# Altium PCB esp_altimeter.PcbDoc
Units mil, origin at the board's own origin, x right, y up, seen from the top; angles counter-clockwise.
Board outline 738.19 x 1043.31 mil, 2 copper layers (Top Layer, Bottom Layer); 24 components, 15 nets, 84 pads, 0 vias.
Unrouted connection lines stored in the file: 53.
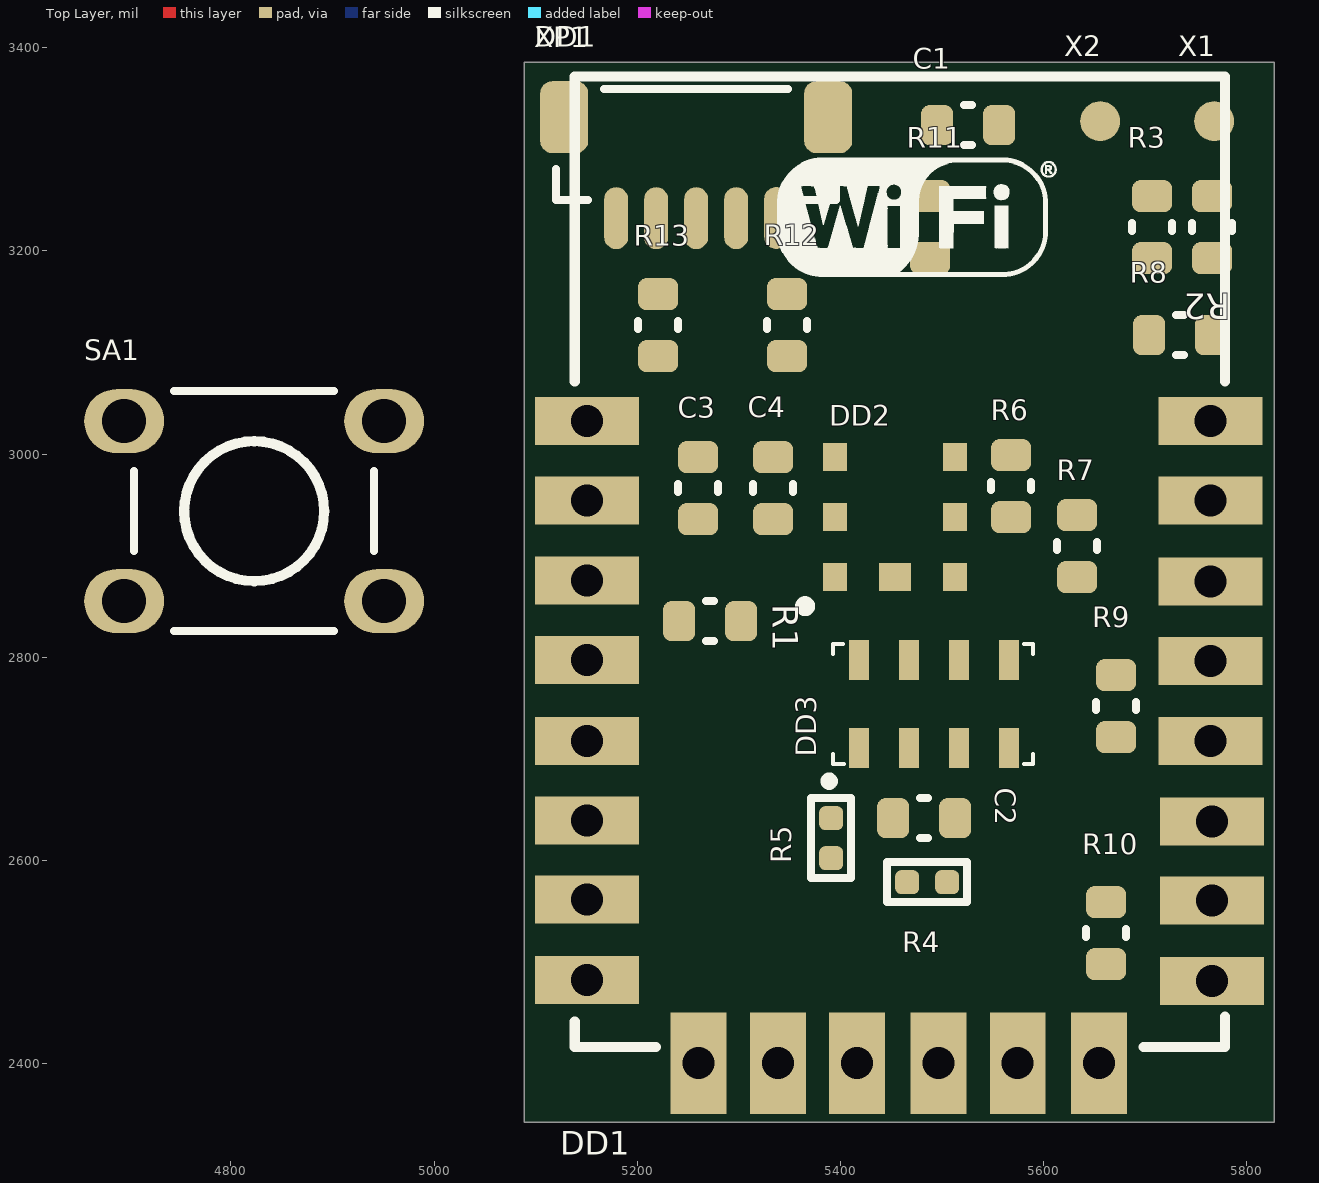
[diagram p0: Top Layer view]
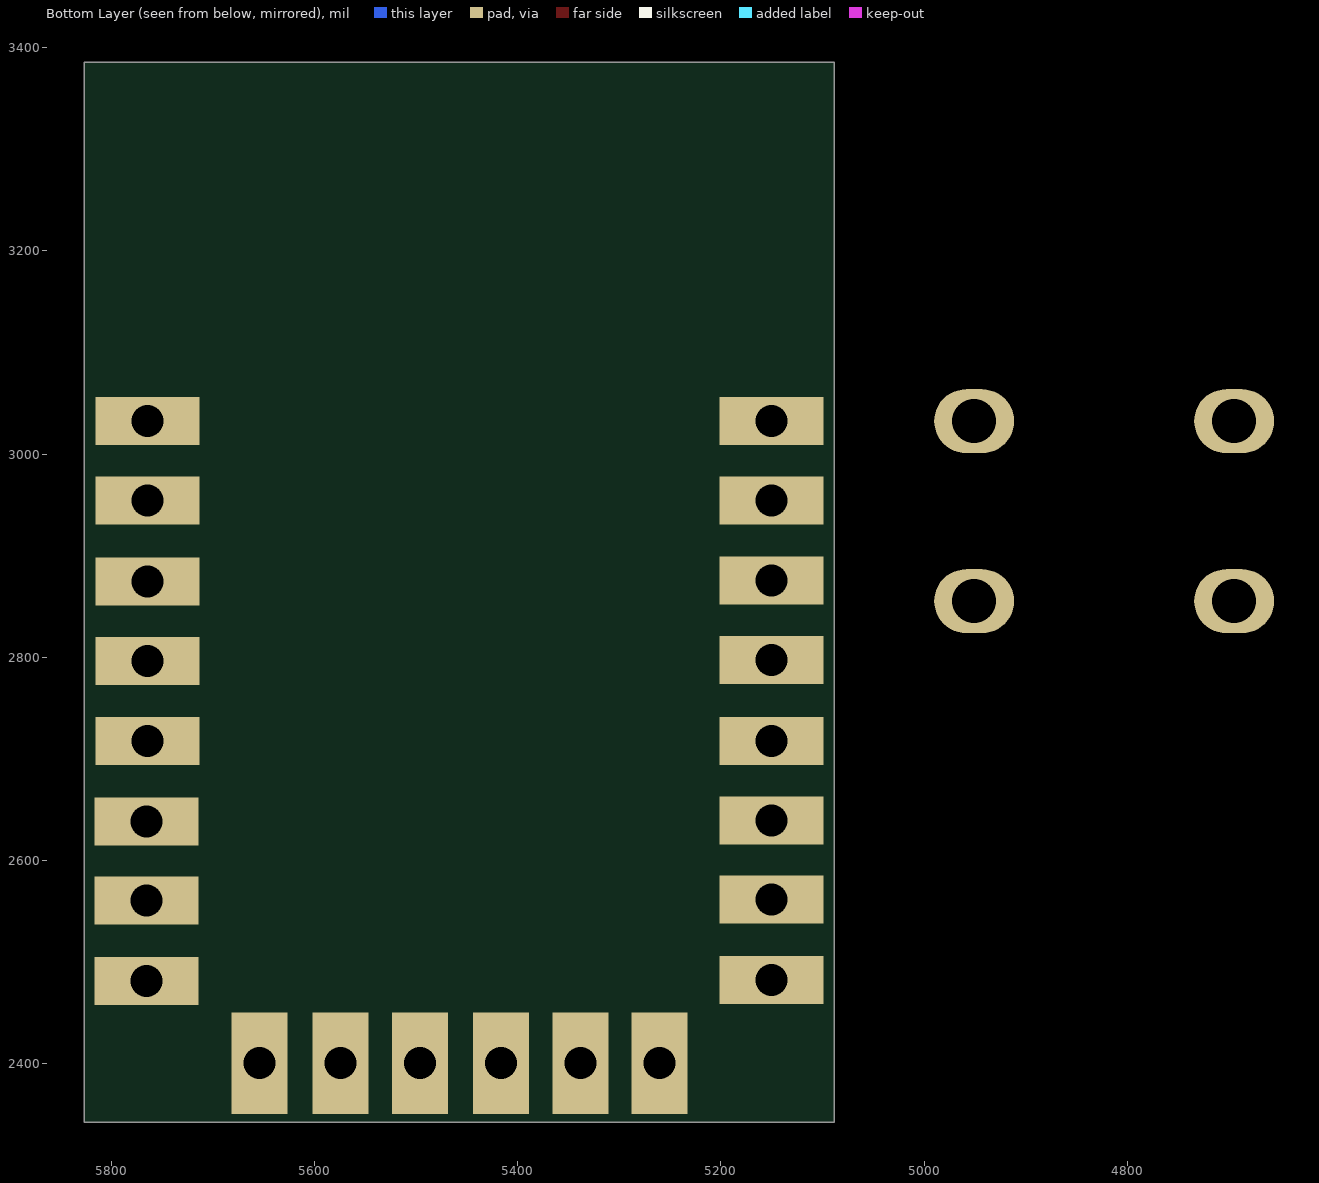
[diagram p1: Bottom Layer view, seen from below]

## Layer stack, top to bottom
Top Solder: solder mask 0.4, Solder Resist, Dk 3.5
Top Layer: signal copper 1.4
Dielectric 1: dielectric 12.6, FR-4, Dk 4.8
Bottom Layer: signal copper 1.4
Bottom Solder: solder mask 0.4, Solder Resist, Dk 3.5

## Board outline
5088.58,2342.52 5088.58,3385.83 5826.77,3385.83 5826.77,2342.52

## Design rules (kind name [scope] priority, off if disabled: settings)
Clearance [All] p1: gap=0 ignorepadtopadclearanceinfootprint=FALSE
PolygonConnect [All] p1: connectstyle=Relief reliefconductorwidth=10 reliefentries=4 polygonreliefangle="90 Angle" airgapwidth=10
RoutingVias [All] p1: holewidth=28 width=50 viastyle="Through Hole" minholewidth=28 minwidth=50 maxholewidth=28 maxwidth=50
SolderMaskExpansion [All] p1: expansion=4
Width [All] p1: maxlimit=10 minlimit=10 preferedwidth=10
30 further rules are at their usual default settings.

## Components (designator, comment, footprint, x,y, rotation, side; value= is the part's Value field where it differs from the comment)
C1 "Cap EIA 0603" "CAP EIA 0603" 5525.59,3323.82 r180 top value=0.1uF
C2 "Cap EIA 0603" "CAP EIA 0603" 5482.28,2641.73 r180 top value=100nF
C3 "Cap EIA 0603" "CAP EIA 0603" 5259.84,2966.54 r90 top
C4 "Cap EIA 0603" "CAP EIA 0603" 5333.66,2966.54 r90 top
DD1 "ESP8266-12E" "ESP8266 ESP-12-E" 5803.34,2386.59 r0 top
DD2 "BMP180" BMP180 5453.74,2937.99 r270 top
DD3 "MS5611" MS5611 5491.14,2753.94 r90 top
R1 "Res EIA 0603" "RES EIA 0603" 5271.65,2835.63 r0 top value=10k
R2 "Res EIA 0603" "RES EIA 0603" 5765.75,3223.43 r270 top value=10k
R3 "Res EIA 0603" "RES EIA 0603" 5706.69,3223.43 r270 top value=470
R4 "Res EIA 0402" "RES EIA 0402" 5485.24,2578.74 r180 top value=0
R5 "Res EIA 0402" "RES EIA 0402" 5390.75,2622.05 r90 top value=0
R6 "Res EIA 0603" "RES EIA 0603" 5567.91,2968.5 r90 top value=10k
R7 "Res EIA 0603" "RES EIA 0603" 5632.87,2909.45 r90 top value=10k
R8 "Res EIA 0603" "RES EIA 0603" 5734.25,3117.13 r0 top value=10k
R9 "BURN" "RES EIA 0603" 5671.26,2751.97 r90 top
R10 "Res EIA 0603" "RES EIA 0603" 5661.42,2528.54 r90 top value=10k
R11 "Res EIA 0603" "RES EIA 0603" 5488.19,3223.43 r90 top value=10k
R12 "Res EIA 0603" "RES EIA 0603" 5347.44,3126.97 r270 top value=22k
R13 "Res EIA 0603" "RES EIA 0603" 5220.47,3126.97 r90 top value=10k
SA1 "RESET" 1-1825910-4 4822.83,2943.9 r180 top value="Кнопка тактовая, высота 9,5 мм, 50 мА, монтаж в отверстия"
X1 "V_Bat+" "Pin - Referal" 5767.72,3327.76 r0 top value="Generic Pin Contact Referal"
X2 "V_Bat_GND" "Pin - Referal" 5655.51,3327.76 r0 top value="Generic Pin Contact Referal"
XP1 "BM05B-SRSS-TB" BM05B-SRSS-TB 5257.87,3300.2 r0 top value="Разъем штыревой 5-и контактный угловой"

## Footprints (in the part's own frame and the unit in brackets; to place one, negate y for a bottom-side part, rotate by r counter-clockwise, add the part's x,y. Pads: shape width x height; smd on the part's side, far side on the other; paste and mask are expansions set on the pad)
1-1825910-4 [mm] "6x6 Tackt Switch 9.5mm Heigh"
  oval 2x1.6 hole 1.1: 1(-3.25,2.25) 1(3.25,2.25) 2(-3.25,-2.25) 2(3.25,-2.25)
  silkscreen extent -3,-3 3,3, body extent -3.9,-2.99 3.9,3, height 9.5
BM05B-SRSS-TB [mm]
  rrect50% 1.2x1.8 smd: 0(-3.3,0.8) 0(3.3,0.8)
  oval 0.6x1.55 smd: 1(-2,-1.725) 2(-1,-1.725) 3(0,-1.725) 4(1,-1.725) 5(2,-1.72)
  silkscreen extent -3.5,-1.28 3.5,1.5, body extent -3.5,-2.07 3.5,1.53, height 4.25
BMP180 [mm] "A specific case for Bosch pressure sensor"
  rect 0.7x0.6 smd: 1(1.5,-1.5) 2(0,-1.5) 3(-1.5,-1.5) 4(-1.5,1.5) 5(0,1.5) 6(1.5,1.5)
  rect 0.7x0.8 smd: 7(1.5,0)
  silkscreen extent 2.1,-2.37 2.35,-2.12, body extent -1.9,-1.8 1.9,1.8, height 1.01
"CAP EIA 0603" [mm] "Chip Resistor, 2-Leads, Body 1.57x0.85mm, IPC Medium Density"
  rrect50% 0.8x1 smd: 1(-0.775,0) 2(0.775,0)
  silkscreen extent -0.1,-0.5 0.1,0.5, body extent -0.8,-0.4 0.8,0.4, height 0.3
"ESP8266 ESP-12-E" [mm] "ESP8266 ESP-12-E"
  rect 2.6x1.2 hole 0.8: 1(-16.586,16.408) 2(-16.586,14.427) 3(-16.586,12.421) 4(-16.586,10.439) 5(-16.586,8.407) 6(-16.586,6.426) 7(-16.586,4.445) 8(-16.586,2.438) 15(-0.965,2.413) 16(-0.965,4.42) 17(-0.965,6.401) 18(-0.991,8.407) 19(-0.991,10.414) 20(-0.991,12.395) 21(-0.991,14.427) 22(-0.991,16.408)
  rect 1.397x2.54 hole 0.8: 9(-13.792,0.356) 10(-11.811,0.356) 11(-9.83,0.356) 12(-7.798,0.356) 13(-5.817,0.356) 14(-3.785,0.356)
  silkscreen extent -16.89,0.76 -0.64,25.02, body extent -16.79,0.93 -0.79,24.93, height 2.18
MS5611 [mm]
  rect 1x0.5 smd: 1(-1.1,1.85) 2(-1.1,0.6) 3(-1.1,-0.65) 4(-1.1,-1.9) 5(1.1,-1.9) 6(1.1,-0.65) 7(1.1,0.6) 8(1.1,1.85)
  silkscreen extent -2.02,-2.5 1.5,2.69, body extent -1.5,-2.52 1.5,2.48, height 1.02
"Pin - Referal" [mm]
  round 1 smd mask+0.5: 1(0,0)
"RES EIA 0402" [mm] "Chip Resistor, 2-Leads, Body 1,00x0,50mm, IPC Medium Density"
  rrect50% 0.6x0.6 smd: 1(-0.5,0) 2(0.5,0)
  silkscreen extent -1,-0.5 1,0.5, body extent -0.51,-0.25 0.51,0.25, height 0.51
"RES EIA 0603" [mm] "Chip Resistor, 2-Leads, Body 1.57x0.85mm, IPC Medium Density"
  rrect50% 0.8x1 smd: 1(-0.775,0) 2(0.775,0)
  silkscreen extent -0.1,-0.5 0.1,0.5, body extent -0.8,-0.4 0.8,0.4, height 0.3

## Part data
DD1: library part "ESP8266 ESP-12E-RU", Manufacturer="Espressif Systems", Group=Микросхема, Name=ESP8266-12E, Supplier=www.elsin.ru
DD2: Manufacturer=Bosch, Group=Микросхемы, Name=BMP180, Supplier=www.elsin.ru
R9: library part "Res EIA 0603", Group=Резисторы
SA1: library part 1-1825910-4_1, "6mm Tack Switch, Thru-Hole, 9.5mm Heigh", Manufacturer="TE Connectivity", Group=Переключатели, Name=1-1825910-4, Supplier="ООО\"Компэл\""
X1 X2: library part Pin_Referal, "Generic Pin Contact", Manufacturer=-, Group=-, Name=-, Supplier=-
XP1: "5-Pin Angle Connector", Manufacturer=JST, Group=Разъемы, Name=BM05B-SRSS-TB, Supplier="ООО\"Компэл\""
C1 C2 C3 C4: Group=Конденсаторы
R1 R2 R3 R4 R5 R6 R7 R8 R10 R11 R12 R13: Group=Резисторы

## Nets (pads, with @x,y where several pads share a name; then routed paths per layer and width w, separated by ;. In a path a pad name is that pad's centre, name@x,y a point inside that pad or via, vN(x,y) a via of type N, cw(c..) or ccw(c..) an arc to the next point about the centre after c; other vN are vias at no path point)
+3.3V: C1.2 C2.2 C3.2 C4.2 DD1.8 DD2.2 DD2.3 DD3.1 DD3.2 R1.2 R2.2 R5.2 R6.2 R7.2 R8.2 R11.2 X1.1
Ardu_RX: R13.2 XP1.2
Ardu_TX: DD1.22 XP1.3
DTR: R9.2 R11.1 XP1.4
GND: C1.1 C2.1 C3.1 C4.1 DD1.15 DD2.7 DD3.3 R4.1 R10.1 R12.1 SA1.1 X2.1 XP1.5
NetDD1_3: DD1.3 R1.1
NetDD1_4: DD1.4 R3.2
NetDD1_16: DD1.16 R10.2
NetDD1_17: DD1.17 R8.1
NetDD1_18: DD1.18 R9.1
NetDD1_21: DD1.21 R12.2 R13.1
NetDD3_4: DD3.4 R4.2 R5.1
RTS: DD1.1 R2.1 R3.1 SA1.2 XP1.1
SCL: DD1.20 DD2.5 DD3.8 R6.1
SDA: DD1.19 DD2.6 DD3.7 R7.1
pads on no net: DD1.2 DD1.5 DD1.6 DD1.7 DD1.9 DD1.10 DD1.11 DD1.12 DD1.13 DD1.14 DD2.1 DD2.4 DD3.5 DD3.6 XP1.0

## Silkscreen, mask and mechanical layers (free items; w line width, h text height)
Mechanical 13:
  the board outline again, w10

## Text inside footprints (layer, text, board x,y; h text height)
DD1: Mechanical 13 "CUTOUT POLYGON" at 5150.38,3327.18 h10; Mechanical 13 "ANTENNA AREA" at 5150.38,3347.18 h10